# EAGLE board fuentesimetrica (EAGLE 7.7.0)
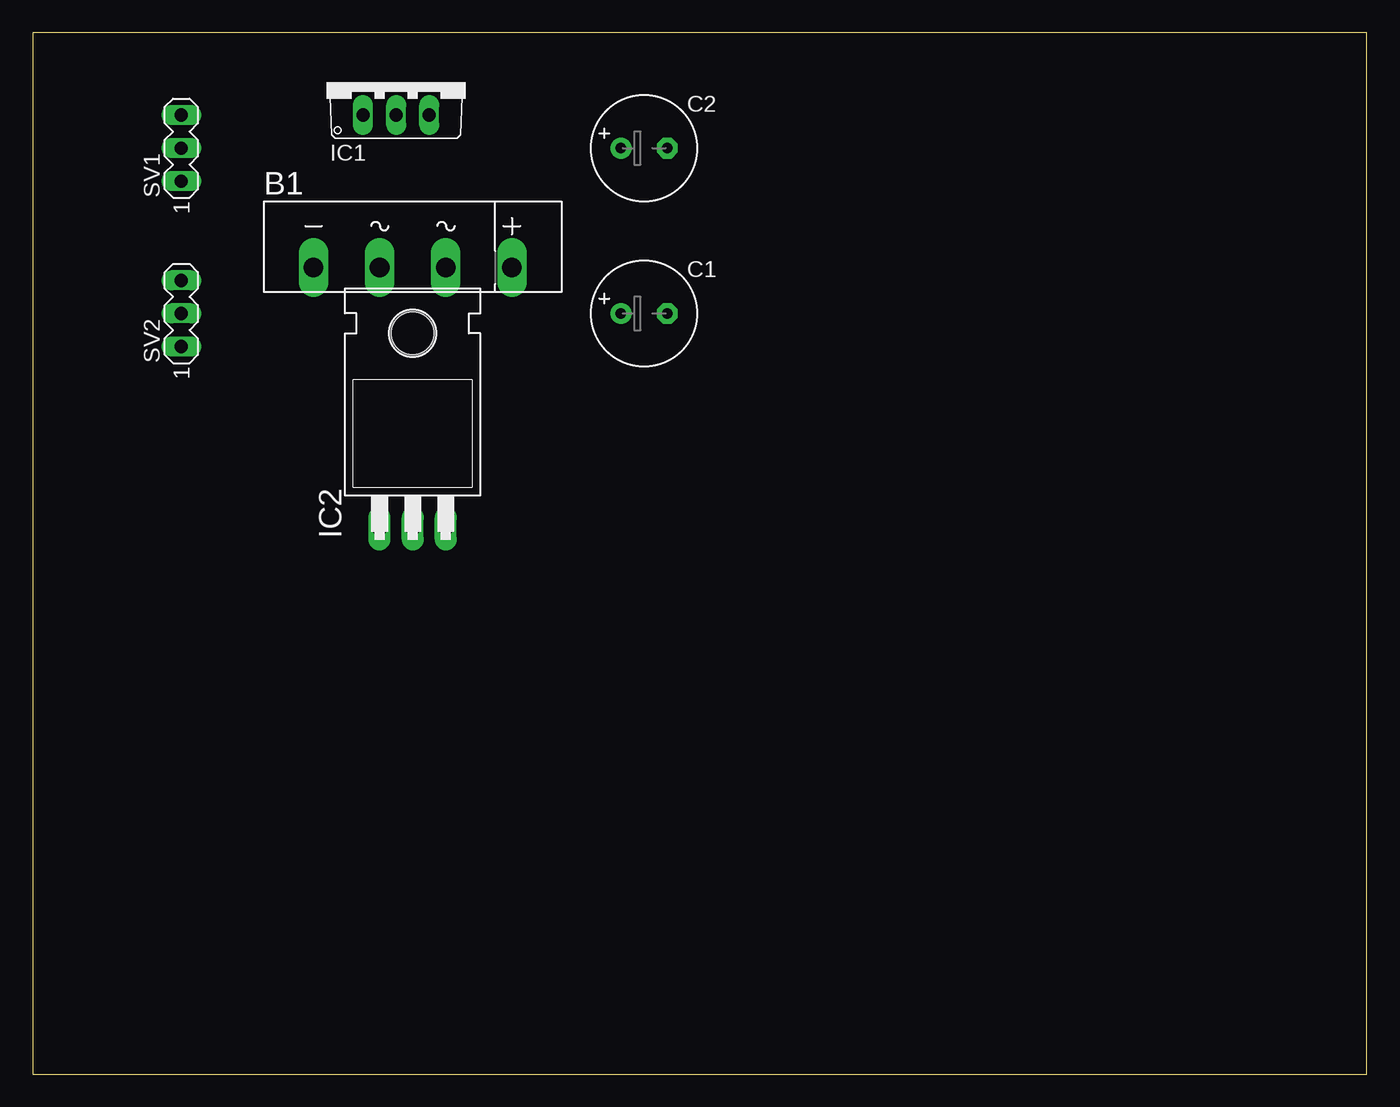
[diagram p0: board, top side]
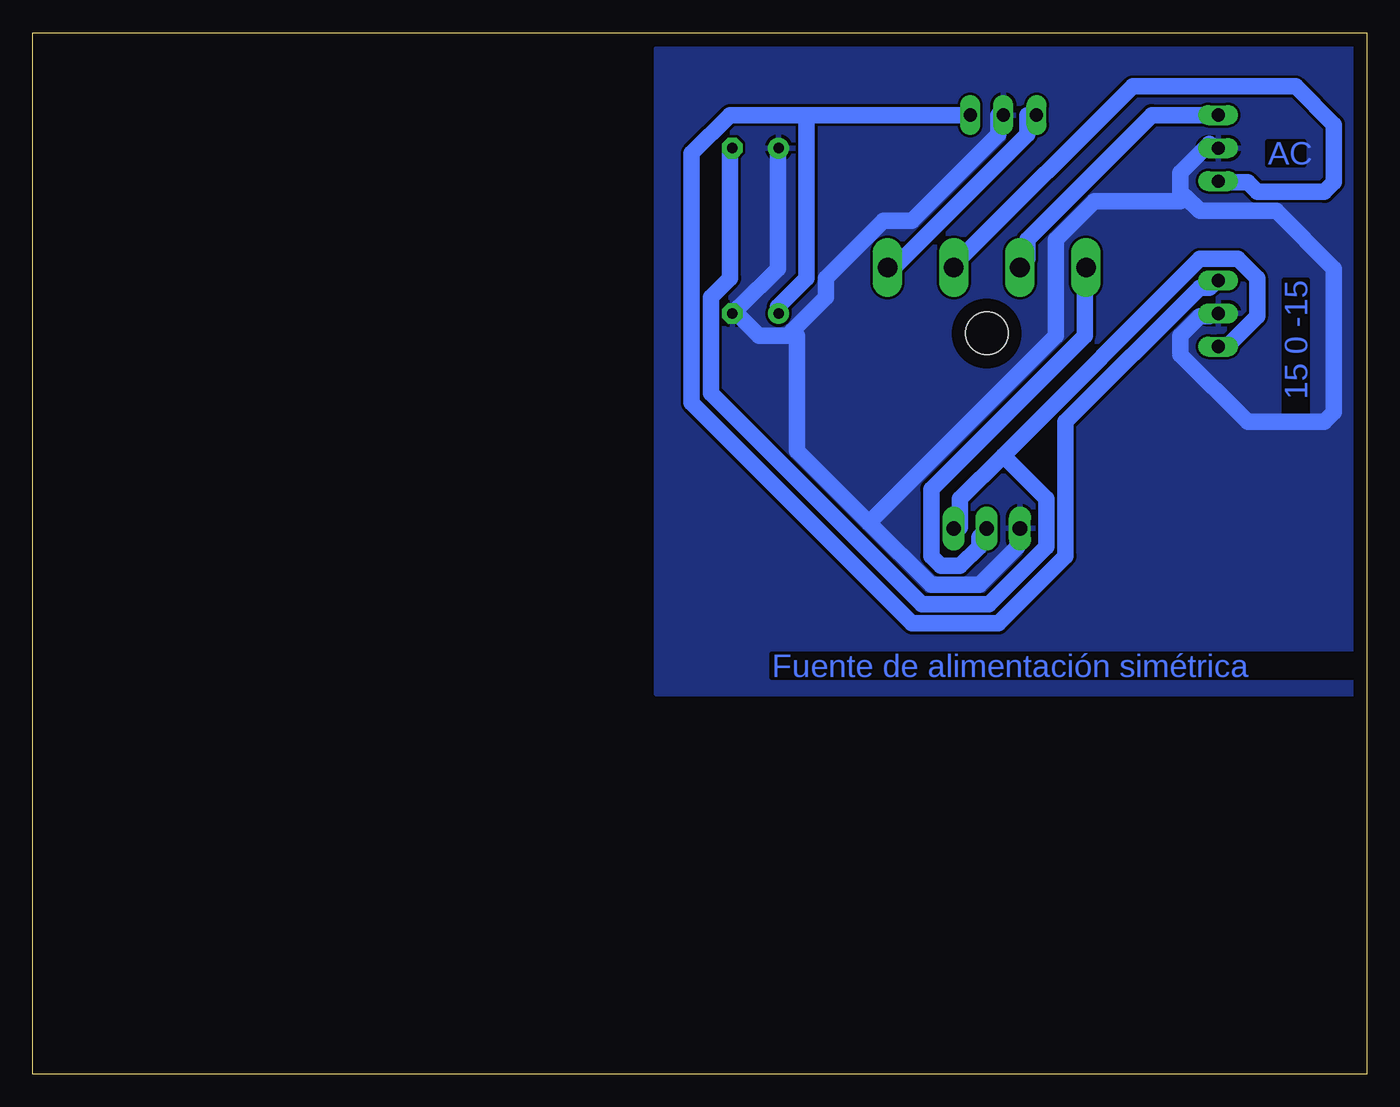
[diagram p1: board, bottom side, seen from below]

Size 102.54 x 80 mm. Coordinates in mm from the lower left corner, seen from the top.
Outline: 0,0 102.54,0 102.54,80 0,80 0,0
Copper layers (1*16): Top 0.035mm / dielectric 1.5mm / Bottom 0.035mm
Design rules "default *": minimum track width 50mil, minimum drill 24mil, track to track 8mil, track to pad 8mil, pad to pad 8mil, via to via 8mil, smd to smd 8mil, copper to edge 40mil, drill to drill 8mil, minimum pad ring 10mil, minimum via ring 8mil, stop-mask expansion 4mil, vias tented up to drill 0mil, thermal gap 10mil

## Footprints (pad centres in the part's own frame; a part is rotated, then mirrored left to right if it is on the bottom)
FBU4 = drill 1.499 long: + 7.62,-1.54; - -7.62,-1.54; AC1 2.54,-1.54; AC2 -2.54,-1.54
E3,5-8 = drill 0.813 pad 1.6: + -1.778,0 | drill 0.813 pad 1.6 octagon: - 1.778,0
TO220V = drill 1.016 long: 1 -2.54,-2.54; 2 0,-2.54; 3 2.54,-2.54
TO220H = drill 1.118 long: 1 -2.54,-10.16; 2 0,-10.16; 3 2.54,-10.16 | hole 3.302: 0,4.826
MA03-1 = drill 1.016 long: 1 -2.54,0; 2 0,0; 3 2.54,0

## Placement (x,y rotation side)
B1  [FBU4]  29.21,63.5 0 top
C1  [E3,5-8]  46.99,58.42 0 top
C2  [E3,5-8]  46.99,71.12 0 top
IC1  7815TV  [TO220V]  27.94,76.2 0 top
IC2  [TO220H]  29.21,52.07 0 top
SV1  [MA03-1]  11.43,71.12 90 top
SV2  [MA03-1]  11.43,58.42 90 top

## Library data of the parts
B1 = rectifier
C1 C2 = rcl
IC1 IC2 = linear
SV1 SV2 = con-lstb; OC_FARNELL: unknown; OC_NEWARK: unknown

## Nets
GND: C1.- C2.+ IC1.2 IC2.1 SV1.2 SV2.2
N$1: B1.AC2 SV1.3
N$2: B1.AC1 SV1.1
N$3: B1.- IC2.2
N$4: B1.+ IC1.1
N$8: C1.+ IC1.3 SV2.3
N$9: C2.- IC2.3 SV2.1

## Tracks (layer width: path | path; a pad name or v marks a point on that pad's centre or on a via)
GND
  Bottom 1.27: 13.96,67.4 14.33,67.77 14.33,69.24 12.12,71.45 SV1.2 | 13.96,67.4 12.85,66.29 6.96,66.29 2.54,61.87 2.54,50.83 3.28,50.09 9.17,50.09 14.33,55.24 14.33,56.72 12.85,58.19 12.12,58.19 SV2.2 | 44.16,57.09 44.53,56.72 46.74,56.72 48.21,58.19 C1.- 48.21,58.93 45.26,61.87 45.26,70.71 C2.+ | 44.16,57.09 41.58,59.66 41.58,61.14 37.16,65.56 34.95,65.56 28.32,72.19 28.32,73.66 IC1.2 | 38.27,42.35 43.79,47.88 43.79,56.72 44.16,57.09 | 38.27,42.35 33.48,37.57 29.79,37.57 26.85,40.51 26.85,41.25 IC2.1 | 38.27,42.35 23.9,56.72 23.9,64.08 20.95,67.03 14.33,67.03 13.96,67.4
  pour Bottom: -2.54,78.74 54.61,78.74 54.61,29.21 -2.54,29.21
N$1
  Bottom 1.27: SV1.3 16.54,73.66 26.11,64.08 26.11,62.61 B1.AC2
N$2
  Bottom 1.27: SV1.1 11.38,68.5 9.17,68.5 8.43,67.77 3.28,67.77 2.54,68.5 2.54,72.92 5.49,75.87 18.01,75.87 31.27,62.61 B1.AC1
N$3
  Bottom 1.27: IC2.2 29.79,41.25 29.79,40.51 31.27,39.04 32.74,39.04 33.48,39.78 33.48,44.93 21.69,56.72 21.69,61.87 B1.-
N$4
  Bottom 1.27: IC1.1 26.11,73.66 26.11,72.19 36.42,61.87 B1.+
N$8
  Bottom 1.27: IC1.3 43.05,73.66 | 43.05,73.66 48.95,73.66 51.89,70.71 51.89,51.56 34.95,34.62 28.32,34.62 23.16,39.78 23.16,50.09 12.85,60.4 12.12,60.4 SV2.3 | 43.05,73.66 43.05,61.14 45.26,58.93 C1.+
N$9
  Bottom 1.27: 27.95,47.51 31.27,44.2 31.27,41.99 IC2.3 | 27.95,47.51 12.85,62.61 9.91,62.61 8.43,61.14 8.43,58.19 10.64,55.98 11.38,55.98 SV2.1 | 27.95,47.51 24.64,44.2 24.64,40.51 29.06,36.09 34.21,36.09 50.42,52.3 50.42,59.66 48.95,61.14 48.95,70.71 C2.-

## Text on the board
Bottom: AC | 15 0 -15 | Fuente de alimentación simétrica